# Altium PCB POWER.PcbDoc
Units mm, origin at the board's own origin, x right, y up, seen from the top; angles counter-clockwise.
Board outline 22 x 22 mm, 2 copper layers (Top Layer, Bottom Layer), stack 0.871 mm thick; 35 components, 21 nets, 122 pads, 114 vias.
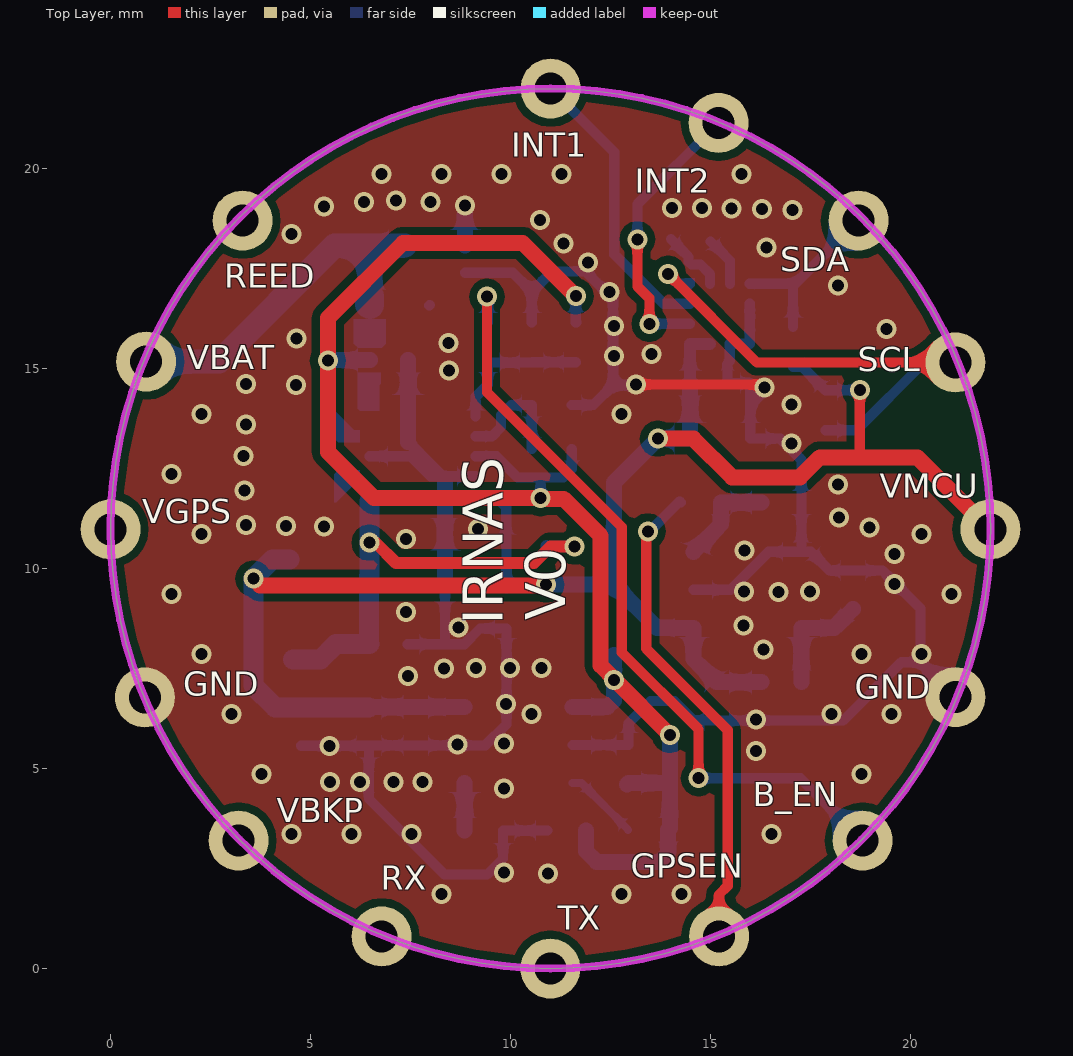
[diagram p0: Top Layer view]
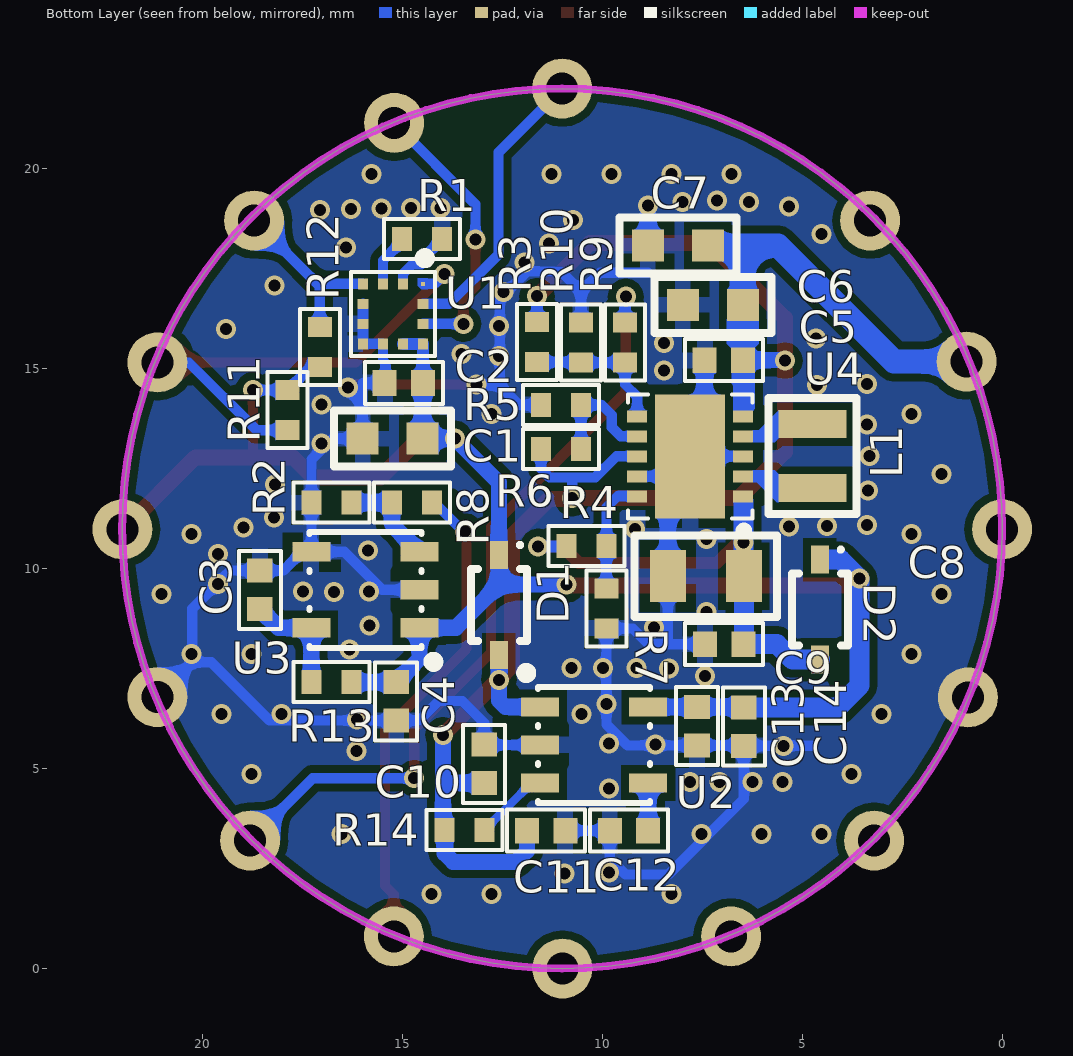
[diagram p1: Bottom Layer view, seen from below]

## Layer stack, top to bottom
Top Solder: solder mask 0.0102, Solder Resist, Dk 3.5
Top Layer: signal copper 0.0356
Dielectric 1: dielectric 0.8, FR-4, Dk 4.8
Bottom Layer: signal copper 0.0356
Bottom Solder: solder mask 0.0102, Solder Resist, Dk 3.5

## Board outline
11,0 cw(c11,11) 0,11 cw(c11,11) 11,22 cw(c11,11) 22,11 cw(c11,11)

## Design rules (kind name [scope] priority, off if disabled: settings)
Clearance [All] p1: gap=0.2 ignorepadtopadclearanceinfootprint=FALSE
PolygonConnect [All] p1: thpad.connectstyle=Direct thpad.reliefconductorwidth=0.254 thpad.reliefentries=4 thpad.polygonreliefangle="90 Angle" thpad.airgapwidth=0.254 smdpad.connectstyle=Relief smdpad.reliefconductorwidth=0.4 smdpad.reliefentries=4 smdpad.polygonreliefangle="90 Angle" smdpad.airgapwidth=0.254 via.connectstyle=Direct via.reliefconductorwidth=0.254 via.reliefentries=4 via.polygonreliefangle="90 Angle" via.airgapwidth=0.254
RoutingVias [All] p1: holewidth=0.3 width=0.5 viastyle="Through Hole" minholewidth=0.3 minwidth=0.5 maxholewidth=0.711 maxwidth=1.27
SolderMaskExpansion [All] p1: expansion=0.102
Width [All] p1: maxlimit=5 minlimit=0.2 preferedwidth=0.3
30 further rules are at their usual default settings.

## Classes and differential pairs
component class POWER: C3 C4 C5 C6 C7 C8 C9 C10 C11 C12 C13 C14 D1 D2 L1 R2 R3 R4 R5 R6 R7 R8 R9 R10 R13 R14 U2 U3 U4
component class MAIN_POWER: R11 R12
component class ACCELEROMETER: C1 C2 R1 U1

## Components (designator, comment, footprint, x,y, rotation, side; value= is the part's Value field where it differs from the comment)
C1 "10uF" CAP0603 15.24,13.25 r180 bottom
C2 "100nF" CAP0402 14.96,14.64 r180 bottom
C3 "2.2uF 6V3" CAP0402 18.56,9.47 r270 bottom
C4 "1uF" CAP0402 15.15,6.68 r90 bottom
C5 "100nF" CAP0402 6.96,15.21 r180 bottom
C6 "4u7/16V" CAP0603 7.23,16.59 r180 bottom
C7 "4u7/16V" CAP0603 8.107,18.073 r180 bottom
C8 "22u 6.3V" CAP0805 7.41,9.81 r180 bottom
C9 "100nF" CAP0402 6.95,8.11 r180 bottom
C10 "1uF" CAP0402 12.95,5.12 r270 bottom
C11 "100nF" CAP0402 11.4,3.45 r0 bottom
C12 "10nF" CAP0402 9.33,3.45 r180 bottom
C13 "1uF" CAP0402 7.63,6.06 r90 bottom
C14 "100nF" CAP0402 6.46,6.05 r90 bottom
D1 "BAT54HT1G" "SOD-323 2L" 12.58,9.09 r270 bottom
D2 "PMEG4005AEA,115" "SOD-323 2L" 4.56,8.976 r270 bottom
L1 "2.2uH" IND2.3X1.7 4.74,12.81 r270 bottom
R1 "10k" RES0402 14.504,18.24 r0 bottom
R2 "100k" RES0402 16.77,11.65 r180 bottom
R3 "0R" RES0402 11.63,15.66 r270 bottom
R4 "402k" RES0402 10.392,10.559 r0 bottom
R5 "0R" RES0402 11.03,14.09 r0 bottom
R6 "0R" RES0402 11.03,12.99 r0 bottom
R7 "100k" RES0402 9.896,9.003 r90 bottom
R8 "100R" RES0402 14.76,11.65 r0 bottom
R9 "100R" RES0402 9.43,15.65 r270 bottom
R10 "100k" RES0402 10.53,15.65 r270 bottom
R11 "10k" RES0402 17.87,13.96 r90 bottom
R12 "10k" RES0402 17.06,15.54 r270 bottom
R13 "0R" RES0402 16.77,7.16 r0 bottom
R14 "100k" RES0402 13.44,3.47 r180 bottom
U1 "LIS2DW12TR" LGA-12 15.23,16.37 r270 bottom
U2 "LP2985-25DBVR" SOT23-5 10.2,5.59 r270 bottom
U3 "TPS78318DDCT" SOT23-5 15.92,9.47 r90 bottom
U4 "STBB1-APUR" DFN-10 7.8,12.808 r90 bottom

## Footprints (in the part's own frame and the unit in brackets; to place one, negate y for a bottom-side part, rotate by r counter-clockwise, add the part's x,y. Pads: shape width x height; smd on the part's side, far side on the other; paste and mask are expansions set on the pad)
CAP0402 [mm] "Chip Capacitor, 2-Leads, Body 1.00x0.50mm, IPC Medium Density"
  rect 0.6x0.64 smd: 1(-0.48,0) 2(0.48,0)
  silkscreen extent -0.97,-0.53 0.97,0.53, body extent -0.55,-0.3 0.55,0.3, height 0.45
CAP0603 [mm]
  rect 0.8x0.8 smd: 1(-0.75,0) 2(0.75,0)
  silkscreen extent -1.46,-0.7 1.46,0.7, body extent -0.8,-0.4 0.8,0.4, height 0.9
CAP0805 [mm]
  rect 0.9x1.3 smd: 1(-0.95,0) 2(0.95,0)
  silkscreen extent -1.78,-1.02 1.78,1.02, body extent -1,-0.6 1,0.6, height 1.5
DFN-10 [mm]
  rect 3.1x1.75 smd: 0(0,0)
  rect 0.3x0.5 smd: 1(-1,-1.325) 2(-0.5,-1.325) 3(0,-1.325) 4(0.5,-1.325) 5(1,-1.325) 6(1,1.325) 7(0.5,1.325) 8(0,1.325) 9(-0.5,1.325) 10(-1,1.325)
  silkscreen extent -1.95,-1.56 1.55,1.56, body extent -1.55,-1.56 1.55,1.56, height 0.8
IND2.3X1.7 [mm]
  rect 0.7x1.7 smd: 1(-0.8,0) 2(0.8,0)
  silkscreen extent -1.45,-1.1 1.45,1.1, body extent -1,-0.8 1,0.8, height 0.95
LGA-12 [mm]
  rect 0.1x0.1 smd: 1(-0.75,0.75)
  rect 0.275x0.25 smd: 2(-0.75,0.25) 3(-0.75,-0.25) 4(-0.75,-0.75) 7(0.75,-0.75) 8(0.75,-0.25) 9(0.75,0.25) 10(0.75,0.75)
  rect 0.25x0.275 smd: 5(-0.25,-0.75) 6(0.25,-0.75) 11(0.25,0.75) 12(-0.25,0.75)
  Top Layer region: -0.615,0.875 -0.89,0.875 -0.89,0.625 -0.703,0.625 -0.615,0.713
  silkscreen extent -1.51,-1.05 1.05,1.05, body extent -1,-1 1,1, height 0.95
RES0402 [mm] "Chip Resistor, 2-Leads, Body 1.00x0.50mm, IPC Medium Density"
  rect 0.5x0.6 smd: 1(-0.5,0) 2(0.5,0)
  silkscreen extent -0.95,-0.5 0.95,0.5, body extent -0.5,-0.25 0.5,0.25, height 0.35
"SOD-323 2L" [mm]
  rect 0.7x0.45 smd: 1(-1.25,0) 2(1.25,0)
  silkscreen extent -1.55,-0.7 0.9,0.7, body extent -1.1,-0.67 1.1,0.67, height 1.1
SOT23-5 [mm]
  rect 0.48x0.95 smd: 1(-0.95,-1.35) 2(0,-1.35) 3(0.95,-1.35) 4(0.95,1.35) 5(-0.95,1.35)
  silkscreen extent -1.92,-1.83 1.45,1.4, body extent -1.45,-1.4 1.45,1.4, height 1.45

## Part data
C1: library part "C - 10uF/10V", "Cap Ceramic 10uF 10V X5R 10% SMD 0603 85C Paper T/R", Case/Package=0603, Case Code (Metric)=1608, Dielectric=X5R, IRNAS Part No.=/, Manufacturer=Samsung, Manufacturer Part Number=CL10A106KP8NNNC, Max Operating Temperature=85°C, Min Operating Temperature=-55°C, Package Quantity=1, Supplier Part Number 1=1276-1192-1-ND, Tolerance=10%, Voltage Rating=10V, Capacitance=10uF, Case Code (Imperial)=0603, ComponentLink1Description=https://www.verical.com/server-webapp/html/getDatasheet?partID=359551, ComponentLink1URL=https://www.verical.com/server-webapp/html/getDatasheet?partID=359551, ComponentLink2Description=http://www1.futureelectronics.com/doc/SAMSUNG%20PASSIVE/CL05B104KQ5NNNC.pdf, ComponentLink2URL=http://www1.futureelectronics.com/doc/SAMSUNG%20PASSIVE/CL05B104KQ5NNNC.pdf, ComponentLink3Description=https://produktinfo.conrad.com/datenblaetter/450000-474999/457369-da-01-en-VS_KONDENSATOR_0603.pdf, ComponentLink3URL=https://produktinfo.conrad.com/datenblaetter/450000-474999/457369-da-01-en-VS_KONDENSATOR_0603.pdf, Contact Plating=Tin, Depth=0.8mm, Height=0.8mm, Lead Free="Lead Free", Length=1.6mm, Material=Ceramic, Mount="Surface Mount", Packaging="Tape and Reel", Pricing 1="1=0.36, 10=0.248, 100=0.1403, 500=0.099, 1000=0.08663 (USD)", Radiation Hardening=No, Stock 1=2844657, Supplier 1=Digi-Key, Thickness=0.035inch, Voltage Rating (DC)=10V, Width=0.031inch
C2 C5 C9 C11 C14: library part "C - 100nF/0402", "MULTICOMP         MC0402X104J160CT             SMD Multilayer Ceramic Capacitor, 0402 [1005 Metric], 0.1 F, 16 V,  5%, X5R, MC Series                          New", Case Code (Imperial)=0402, Case Code (Metric)=1005, Dielectric=X5R, IRNAS Part No.=/, Manufacturer=Multicomp, Manufacturer Part Number=MC0402X104J160CT, Max Operating Temperature=85°C, Min Operating Temperature=-55°C, Supplier Part Number 1=2627419, Tolerance=5%, Voltage Rating=16V, Capacitance=100nF, ComponentLink1Description=http://www.farnell.com/datasheets/2117933.pdf, ComponentLink1URL=http://www.farnell.com/datasheets/2117933.pdf, ComponentLink2Description=http://www.farnell.com/datasheets/2117900.pdf, ComponentLink2URL=http://www.farnell.com/datasheets/2117900.pdf, Packaging="Tape and Reel", Pricing 1="10=0.0139, 100=0.0108, 500=0.0076, 2500=0.0051, 5000=0.0038 (EUR)", REACH SVHC="No SVHC", Stock 1=3230, Supplier 1=Farnell, Voltage Rating (DC)=16V
C3: library part "C - 2.2uF/6V3/0402", "CAP CER 2.2UF 6.3V 20% X5R 0402", Capacitance=2.2uF, Case/Package=0402, Case Code (Metric)=1005, Dielectric=X5R, IRNAS Part No.=/, Manufacturer=Murata, Manufacturer Part Number=GRM155R60J225ME15D, Max Operating Temperature=85°C, Min Operating Temperature=-55°C, Package Quantity=10000, Supplier Part Number 1=2362088, Tolerance=20%, Voltage=6.3V, Case Code (Imperial)=0402, ComponentLink1Description=https://datasheet.ciiva.com/29149/450128-da-01-de-vs-kondens-grm155-r60j-225me15d-29149006.pdf, ComponentLink1URL=https://datasheet.ciiva.com/29149/450128-da-01-de-vs-kondens-grm155-r60j-225me15d-29149006.pdf, ComponentLink2Description=https://datasheet.ciiva.com/46418/1754686-46418042.pdf, ComponentLink2URL=https://datasheet.ciiva.com/46418/1754686-46418042.pdf, ComponentLink3Description=https://datasheet.ciiva.com/17454/c02e-17454956.pdf, ComponentLink3URL=https://datasheet.ciiva.com/17454/c02e-17454956.pdf, ComponentLink4Description=https://datasheet.ciiva.com/235/partnumbering-e-01-235009.pdf, ComponentLink4URL=https://datasheet.ciiva.com/235/partnumbering-e-01-235009.pdf, ComponentLink5Description=https://datasheet.ciiva.com/2989/c02e-2989361.pdf, ComponentLink5URL=https://datasheet.ciiva.com/2989/c02e-2989361.pdf, ComponentLink6Description=https://datasheet.ciiva.com/235/partnumbering-e-01-235010.pdf, ComponentLink6URL=https://datasheet.ciiva.com/235/partnumbering-e-01-235010.pdf, ComponentLink7Description=https://datasheet.ciiva.com/235/partnumbering-e-01-235011.pdf, ComponentLink7URL=https://datasheet.ciiva.com/235/partnumbering-e-01-235011.pdf, Depth=0.5mm, Height=0.5mm, Lead Free="Lead Free", Length=1mm, Material=Ceramic, Mount="Surface Mount", Packaging="Tape and Reel", Pricing 1="10=0.118, 100=0.0494, 500=0.031, 2500=0.0213, 5000=0.0163 (EUR)", Radiation Hardening=No, REACH SVHC="No SVHC", Stock 1=0, Supplier 1=Farnell, Termination=SMD/SMT, Thickness=0.022inch, Voltage Rating=6.3V, Voltage Rating (DC)=6.3V, Width=0.02inch
C4 C10 C13: library part "C - 1uF/0402", "CAP CER 1UF 10V 20% X5R 0402", Case/Package=0402, Case Code (Metric)=1005, Dielectric=X5R, IRNAS Part No.=/, Manufacturer=Murata, Manufacturer Part Number=GRM155R61A105ME15D, Max Operating Temperature=85°C, Min Operating Temperature=-55°C, Package Quantity=1, Supplier Part Number 1=2426953, Tolerance=20%, Voltage=10V, Capacitance=1uF, Case Code (Imperial)=0402, ComponentLink1Description=https://datasheet.ciiva.com/164/product-164665.pdf, ComponentLink1URL=https://datasheet.ciiva.com/164/product-164665.pdf, ComponentLink2Description=https://datasheet.ciiva.com/11616/product-11616508.pdf, ComponentLink2URL=https://datasheet.ciiva.com/11616/product-11616508.pdf, ComponentLink3Description=https://datasheet.ciiva.com/46418/1769893-46418047.pdf, ComponentLink3URL=https://datasheet.ciiva.com/46418/1769893-46418047.pdf, ComponentLink4Description=https://datasheet.ciiva.com/164/partnumbering-e-01-164666.pdf, ComponentLink4URL=https://datasheet.ciiva.com/164/partnumbering-e-01-164666.pdf, ComponentLink5Description=https://datasheet.ciiva.com/164/partnumbering-e-01-164667.pdf, ComponentLink5URL=https://datasheet.ciiva.com/164/partnumbering-e-01-164667.pdf, Depth=0.5mm, Height=0.5mm, Lead Free="Lead Free", Length=1mm, Mount="Surface Mount", Packaging="Tape and Reel", Pricing 1="10=0.0379, 100=0.0266, 500=0.0156, 2500=0.0098, 5000=0.0083 (EUR)", Radiation Hardening=No, REACH SVHC="No SVHC", Stock 1=0, Supplier 1=Farnell, Thickness=0.022inch, Voltage Rating=10V, Voltage Rating (DC)=10V, Width=0.02inch
C6 C7: library part "C - 4u7  16V 0603", "MURATA - GRM188R61C475KAAJD - CAP, MLCC, X5R, 4.7UF, 16V, 0603", Capacitance=4.7, Capacitance Tolerance="± 10%", Ceramic Capacitor Case="0603 [1608 Metric]", Dielectric Characteristic=X5, IRNAS Part No.=I-200001, Manufacturer=MURATA, Manufacturer Part Number=GRM188R61C475KAAJD, Operating Temperature Max=85, Operating Temperature Min=-55, Supplier Part Number 1=2611924, Voltage Rating=16, Automotive Qualification Standard=-, ComponentLink1Description=http://www.farnell.com/datasheets/2079168.pdf, ComponentLink1URL=http://www.farnell.com/datasheets/2079168.pdf, MSL="MSL 1 - Unlimited", Packaging="Cut Tape", Pricing 1="10=0.16, 100=0.0929, 500=0.076, 1000=0.0618, 2000=0.0605, 4000=0.0425, 20000=0.0409, 40000=0.0355 (GBP)", Product Range="GRM Series", RoHS=YES, Stock 1=5038, Supplier 1=Farnell, SVHC="No SVHC (17-Dec-2015)<!--FANDB--><div class=\"features-and-benefits-container\"><div class=\"features-and-benefits-desc-container\"><span class=\"features-and-benefits-container-desc\">SMD Multilayer Ceramic Capacitor, 0603 [1608 Metric], 4.7 µF, 16 V, ± 10%, X5"
C8: library part "C - 22u 6.3V 0805", "MULTICOMP - MC0805X226M6R3CT - CAP, MLCC, X5R, 22UF, 0805", Capacitance=22, Capacitance Tolerance="± 20%", Capacitor Terminals=SMD, Ceramic Capacitor Case="0805 [2012 Metric]", Dielectric Characteristic=X5, IRNAS Part No.=I-200008, Manufacturer=MULTICOMP, Manufacturer Part Number=MC0805X226M6R3CT, Operating Temperature Max=85, Operating Temperature Min=-55, Operating Temperature Range="-55°C to +85°C<!--FANDB--><div class=\"features-and-benefits-container\"><div class=\"features-and-benefits-desc-container\"><span class=\"features-and-benefits-container-desc\">SMD Multilayer Ceramic Capacitor, 0805 [2012 Metric], 22 µF, 6.3 V, ± 20%, X5R, MC Series</span></div><div class=\"features-and-benefits-description\"><span class=\"features-benefits-value\">The Multicomp MC series is general purpose MLCC capacitors with X5R dielectric material which provides high electrical precision, stability and reliability. This MLCC capacitor consists of a conducting material and electrodes with high density and high efficiency ceramic condensers.</span></div><div class=\"features-and-benefits-list\"><ul class=\"features-and-benefits-list-list\"><li class=\"features-and-benefits-list-item\">Small size with higher capacitance values</li><li class=\"features-and-benefits-list-item\">0201, 0402, 0603, 0805, 1206, 1210, 1812 case sizes available</li><li class=\"features-and-benefits-list-item\">Capacitance value ranging from 100pF to 220?F</li><li class=\"features-and-benefits-list-item\">Capacitor with lead free termination (pure Tin)</li><li class=\"features-and-benefits-list-item\">High electrical precision, stability and reliability</li><li class=\"features-and-benefits-list-item\">Rated voltage of 4V, 6.3V, 10V, 16V, 25V, 50V</li><li class=\"features-and-benefits-list-item\">Operating temperature of -55°C to +85°C</li><li class=\"features-and-benefits-list-item\">Available in ±10% and ±20", Supplier Part Number 1=1759415, Voltage Rating=6.3, Automotive Qualification Standard=-, Capacitance Tolerance ±="± 20%", ComponentLink1Description=http://www.farnell.com/datasheets/1901289.pdf, ComponentLink1URL=http://www.farnell.com/datasheets/1901289.pdf, ComponentLink2Description=http://www.farnell.com/datasheets/1932399.pdf, ComponentLink2URL=http://www.farnell.com/datasheets/1932399.pdf, MSL=-, Packaging="Cut Tape", Pricing 1="5=0.128, 50=0.0738, 250=0.0507, 500=0.042, 1500=0.0358 (GBP)", Product Range="MC Series", RoHS=YES, Stock 1=74736, Supplier 1=Farnell, SVHC="No SVHC (07-Jul-2017)"
C12: library part "C - 10nF/0402", "CAP CER 10000PF 16V X7R 0402", Case/Package=0402, Case Code (Metric)=1005, Dielectric=X7R, IRNAS Part No.=/, Manufacturer=Murata, Manufacturer Part Number=GRM155R71C103KA01D, Max Operating Temperature=125°C, Min Operating Temperature=-55°C, Package Quantity=1, Supplier Part Number 1=1828864, Tolerance=10%, Voltage=16V, Capacitance=10nF, Case Code (Imperial)=0402, ComponentLink1Description=https://datasheet.ciiva.com/129/partnumbering-e-01-129774.pdf, ComponentLink1URL=https://datasheet.ciiva.com/129/partnumbering-e-01-129774.pdf, ComponentLink2Description=https://datasheet.ciiva.com/129/partnumbering-e-01-129775.pdf, ComponentLink2URL=https://datasheet.ciiva.com/129/partnumbering-e-01-129775.pdf, ComponentLink3Description=https://datasheet.ciiva.com/129/product-129776.pdf, ComponentLink3URL=https://datasheet.ciiva.com/129/product-129776.pdf, ComponentLink4Description=https://datasheet.ciiva.com/18184/getdatasheetpartid-178863-18184649.pdf, ComponentLink4URL=https://datasheet.ciiva.com/18184/getdatasheetpartid-178863-18184649.pdf, ComponentLink5Description=https://datasheet.ciiva.com/22698/608985-22698415.pdf, ComponentLink5URL=https://datasheet.ciiva.com/22698/608985-22698415.pdf, ComponentLink6Description=https://datasheet.ciiva.com/7937/608985-7937614.pdf, ComponentLink6URL=https://datasheet.ciiva.com/7937/608985-7937614.pdf, Depth=0.5mm, Height=0.5mm, Lead Free="Lead Free", Length=1mm, Mount="Surface Mount", Number of Pins=2, Packaging="Tape and Reel", Pricing 1="10=0.0216, 100=0.0151, 500=0.0104, 2500=0.0069, 5000=0.0056 (EUR)", Radiation Hardening=No, REACH SVHC="No SVHC", Stock 1=16478, Supplier 1=Farnell, Termination=SMD/SMT, Thickness=0.022inch, Voltage Rating=16V, Voltage Rating (DC)=16V, Width=0.02inch
D1: library part "DS - BAT54HT1G", "FAIRCHILD SEMICONDUCTOR - BAT54HT1G - DIODE, SCHOTTKY, 30V, SOD-323", Diode Case Style=SOD-323, Forward Current If(AV)=200, Forward Surge Current Ifsm Max=600, Forward Voltage VF Max=800, Manufacturer="FAIRCHILD SEMICONDUCTOR", Operating Temperature Max=150, Repetitive Reverse Voltage Vrrm Max=30, Supplier Part Number 1=2453769, Automotive Qualification Standard=-, ComponentLink1Description=http://www.farnell.com/datasheets/2251626.pdf, ComponentLink1URL=http://www.farnell.com/datasheets/2251626.pdf, Diode Configuration=Single, Manufacturer Part Number=BAT54HT1G, MSL="MSL 1 - Unlimited", No. of Pins=2, Packaging="Cut Tape", Pricing 1="1=0.0747, 250=0.065, 500=0.055, 1000=0.045, 3000=0.0349, 9000=0.0279 (GBP)", Product Range="BAT54 Series", Reverse Recovery Time trr Max="5ns<!--FANDB--><div class=\"features-and-benefits-container\"><div class=\"features-and-benefits-description\"><span class=\"features-benefits-value\">The BAT54HT1G is a Schottky Barrier Diode for general usage and suitable for many different applications.</span></div><div class=\"features-and-benefits-list\"><ul class=\"features-and-benefits-list-list\"><li class=\"features-and-benefits-list-item\">-65 to 150°C Storage temperature range</li><li class=\"features-and-benefits-list-item\">-55 to 150", RoHS=YES, Stock 1=5495, Supplier 1=Farnell, SVHC="No SVHC (15-Jun-2015)"
D2: library part "DS - PMEG4005AEA,115", "Schottky Rectifier, 40 V, 500 mA, Single", Manufacturer="MICRO COMMERCIAL COMPONENTS", Manufacturer Part Number=SK34A-TP, Supplier Part Number 1=1924423, ComponentLink1Description=Datasheet, ComponentLink1URL=D:\altium\Altium_Library\Active\Datasheet\PMEG4005AEA.pdf, Pricing 1="1=0.736, 10=0.574, 100=0.395, 250=0.328, 500=0.309, 1000=0.287, 5000=0.252, 10000=0.214 (GBP)", RoHS=Y-EX, Stock 1=3770, Supplier 1=Farnell
L1: library part "L - 2.2 uH 900mA", IRNAS Part No.=/, Manufacturer=Bourns, Manufacturer Part Number=SRN2009T-2R2M, Supplier Part Number 1=2808272, Pricing 1="5=0.308, 50=0.201, 250=0.163, 500=0.145, 1000=0.133, 2000=0.124, 10000=0.116 (EUR)", Stock 1=1975, Supplier 1=Farnell
R1 R11 R12: library part "R - 10k/0402", "MULTICOMP         MCWR04X1002FTL             SMD Chip Resistor, Thick Film, 10 kohm, 50 V, 0402 [1005 Metric], 62.5 mW,  1%, MCWR Series", Case/Package=0402, Case Code (Metric)=1005, IRNAS Part No.=I-100014, Manufacturer=Multicomp, Manufacturer Part Number=MCWR04X1002FTL, Power Rating=62.5mW, Resistance=10kR, Supplier Part Number 1=2447096, Temperature Coefficient=100ppm/°C, Tolerance=1%, Voltage Rating=50V, Case Code (Imperial)=0402, ComponentLink1Description=http://www.farnell.com/datasheets/1849611.pdf, ComponentLink1URL=http://www.farnell.com/datasheets/1849611.pdf, Composition="Thick Film", Packaging="Cut Tape", Pricing 1="10=0.0029, 100=0.0017, 500=0.0012, 2500=0.001, 5000=0.0008 (EUR)", REACH SVHC="No SVHC", Stock 1=602609, Supplier 1=Farnell, Voltage Rating (DC)=50V
R2 R7 R10 R14: library part "R - 100k/0402", "MULTICOMP   MCWR04X1003FTL   RES, THICK FILM, 100KOHM, 1%, 0.0625W", Case/Package=0402, Case Code (Metric)=1005, IRNAS Part No.=I-100013, Manufacturer=Multicomp, Manufacturer Part Number=MCWR04X1003FTL, Power Rating=62.5mW, Resistance=100kR, Supplier Part Number 1=2447094, Temperature Coefficient=100ppm/°C, Tolerance=1%, Voltage Rating=50V, Case Code (Imperial)=0402, ComponentLink1Description=https://datasheet.ciiva.com/46386/1849611-46386524.pdf, ComponentLink1URL=https://datasheet.ciiva.com/46386/1849611-46386524.pdf, Composition="Thick Film", Mount="Surface Mount", Packaging="Cut Tape", Pricing 1="10=0.0029, 100=0.0017, 500=0.0012, 2500=0.001, 5000=0.0008 (EUR)", REACH SVHC="No SVHC", Stock 1=161188, Supplier 1=Farnell, Voltage Rating (DC)=50V
R3 R5 R6 R13: library part "R - 0R/0402", "RESISTOR, 0402, 0R, ANTI SULFURATION", Case/Package=0402, Case Code (Metric)=1005, IRNAS Part No.=I-100016, Manufacturer=Multicomp, Manufacturer Part Number=MCMR04X000PTL, Power Rating=62.5mW, Resistance=0mR, Supplier Part Number 1=2072513, Temperature Coefficient=400ppm/°C, Voltage Rating=50V, Case Code (Imperial)=0402, ComponentLink1Description=https://datasheet.ciiva.com/7776/1716705-7776974.pdf, ComponentLink1URL=https://datasheet.ciiva.com/7776/1716705-7776974.pdf, ComponentLink2Description=https://datasheet.ciiva.com/28677/1716705-28677161.pdf, ComponentLink2URL=https://datasheet.ciiva.com/28677/1716705-28677161.pdf, Composition=Ceramic, Packaging="Cut Tape", Pricing 1="10=0.0057, 100=0.0034, 500=0.0024, 2500=0.0019, 5000=0.0015 (EUR)", REACH SVHC="No SVHC", Stock 1=0, Supplier 1=Farnell, Voltage Rating (DC)=50V
R4: library part "R - 402k", "MULTICOMP - MC0063W06031402K - RES, THICK FILM, 402K, 1%, 0.063W, 0603", IRNAS Part No.=/, Manufacturer=MULTICOMP, Manufacturer Part Number=MC0063W06031402K, Power Rating=63, Resistance=402, Resistance Tolerance="± 1%", Resistor Case Style="0603 [1608 Metric]", Resistor Element Material="Thick Film", Resistor Mounting="Surface Mount Device<!--FANDB--><div class=\"features-and-benefits-container\"><div class=\"features-and-benefits-desc-container\"><span class=\"features-and-benefits-container-desc\">SMD Chip Resistor, Thick Film, 402 kohm, 50 V, 0603 [1608 Metric], 63 mW, ± 1%, MC Series</span></div><div class=\"features-and-benefits-description\"><span class=\"features-benefits-value\">The Multicomp MC series current sense resistors are thick film chip resistors. The resistance range includes E96 and E24 decade values from 1ohm to 10Mohm.</span></div><div class=\"features-and-benefits-list\"><ul class=\"features-and-benefits-list-list\"><li class=\"features-and-benefits-list-item\">EIA 0402, 0603, 0805, 1206 chip sizes available</li><li class=\"features-and-benefits-list-item\">Small size and low weight</li><li class=\"features-and-benefits-list-item\">Suitable for both wave and reflow soldering</li><li class=\"features-and-benefits-list-item\">Reduction of assembly costs</li><li class=\"features-and-benefits-list-item\">Maximum working voltage of 50V(0402, 0603), 150V(0805), 200V(1206)</li><li class=\"features-and-benefits-list-item\">Available in ±1%, ±2% and ±5% tolerance</li><li class=\"features-and-benefits-list-item\">Power rating of 62.5mW, 100mW and 125mW</li><li class=\"features-and-benefits-list-item\">±400ppm/°C(1ohm to 10ohm), ±200ppm/°C(11ohm to 100ohm), ±100", Supplier Part Number 1=2131065, Temperature Coefficient="± 100", Voltage Rating=50, Automotive Qualification Standard=-, ComponentLink1Description=http://www.farnell.com/datasheets/1788326.pdf, ComponentLink1URL=http://www.farnell.com/datasheets/1788326.pdf, ComponentLink2Description=http://www.farnell.com/datasheets/1944283.pdf, ComponentLink2URL=http://www.farnell.com/datasheets/1944283.pdf, Packaging="Tape & Reel", Pricing 1="5000=0.0007, 25000=0.0006, 50000=0.0005 (GBP)", Product Range="MC Series", Reel Quantity=5000, RoHS=Y-EX, Stock 1=104996, Supplier 1=Farnell, SVHC="No SVHC (12-Jan-2017)"
R8 R9: library part "R - 100R/0402", "MULTICOMP         MCMR04X1000FTL            SMD Chip Resistor, Ceramic, MCMR Series, 100 ohm, 50 V, 0402 [1005 Metric], 62.5 mW,  1%", Case/Package=0402, Case Code (Metric)=1005, IRNAS Part No.=/, Manufacturer=Multicomp, Manufacturer Part Number=MCMR04X1000FTL, Power Rating=62.5mW, Supplier Part Number 1=2072515, Temperature Coefficient=100ppm/°C, Tolerance=1%, Voltage Rating=50V, Case Code (Imperial)=0402, ComponentLink1Description=https://datasheet.ciiva.com/28692/1716705-28692087.pdf, ComponentLink1URL=https://datasheet.ciiva.com/28692/1716705-28692087.pdf, ComponentLink2Description=https://datasheet.ciiva.com/22708/1716705-22708156.pdf, ComponentLink2URL=https://datasheet.ciiva.com/22708/1716705-22708156.pdf, Composition=Ceramic, Packaging="Cut Tape", Pricing 1="10=0.0071, 100=0.0042, 500=0.003, 2500=0.0024, 5000=0.0019 (GBP)", REACH SVHC="No SVHC", Resistance=100R, Stock 1=62365, Supplier 1=Farnell, Voltage Rating (DC)=50V
U1: library part "SEN - LIS2DW12TR", "MEMS Accelerometer, Digital, X, Y, Z, ± 2g, ± 4g, ± 8g, ± 16g, 1.62 V, 3.6 V", Case/Package=QFN, Manufacturer="TDK InvenSense", Manufacturer Part Number=MPU-9250, Max Operating Temperature=85°C, Max Supply Voltage=3.6V, Min Operating Temperature=-40°C, Min Supply Voltage=2.4V, Package Quantity=1, Supplier Part Number 1=883-7942P, ComponentLink1Description=Datasheet, ComponentLink1URL=D:\altium\Altium_Library\Active\Datasheet\LIS2DW12TR.pdf, Height=1mm, Interface=I2C, Length=3.1mm, Mount="Surface Mount", Number of Pins=24, Output Type=SPI, RoHS=Yes, Sensor Type=Accelerometer, Stock 1=0, Supplier 1=RSComponents, Width=3.1mm
U2: library part "V_LIN - LP2985-25DBVR", "Fixed LDO Voltage Regulator, 2.2V to 16V, 280mV Dropout, 2.5Vout, 150mAout", DC / DC Converter IC Case=TO-263, Input Voltage Max=45, Input Voltage Min=4.5, Manufacturer="ON SEMICONDUCTOR", Manufacturer Part Number=LM2596DSADJG, Operating Temperature Max=125, Output Current=3, Output Voltage Max=37, Output Voltage Min=1.23, Supplier Part Number 1=2534162, Switching Frequency=150, Automotive Qualification Standard=-, ComponentLink1Description=http://www.farnell.com/datasheets/2031954.pdf, ComponentLink1URL=http://www.farnell.com/datasheets/2031954.pdf, MSL="MSL 1 - Unlimited", No. of Outputs=1, No. of Pins=5, Packaging=Each, Pricing 1="1=1.98, 10=1.49, 100=1.19, 500=1.04, 1000=0.859, 2500=0.785 (GBP)", Product Range=-, RoHS=YES, Stock 1=342, Supplier 1=Farnell, SVHC="No SVHC (12-Jan-2017", Topology="Buck (Step Down)"
U3: library part "V_LIN - TPS78318DDCT", "Fixed LDO Voltage Regulator, 2.2V to 5.5V, 130mV Dropout, 1.8Vout, 150mAout", DC / DC Converter IC Case=TO-263, Input Voltage Max=45, Input Voltage Min=4.5, Manufacturer="ON SEMICONDUCTOR", Manufacturer Part Number=LM2596DSADJG, Operating Temperature Max=125, Output Current=3, Output Voltage Max=37, Output Voltage Min=1.23, Supplier Part Number 1=2534162, Switching Frequency=150, Automotive Qualification Standard=-, ComponentLink1Description=http://www.farnell.com/datasheets/2031954.pdf, ComponentLink1URL=http://www.farnell.com/datasheets/2031954.pdf, MSL="MSL 1 - Unlimited", No. of Outputs=1, No. of Pins=5, Packaging=Each, Pricing 1="1=1.98, 10=1.49, 100=1.19, 500=1.04, 1000=0.859, 2500=0.785 (GBP)", Product Range=-, RoHS=YES, Stock 1=342, Supplier 1=Farnell, SVHC="No SVHC (12-Jan-2017", Topology="Buck (Step Down)"
U4: library part "V_SW - STBB1-APUR", "DC-DC Switching Buck-Boost Regulator, Adjustable, 2V-5.5Vin, 1.2V-5.5Vout, 1Aout", Manufacturer=u-blox, Manufacturer Part Number=MAX-M8Q-0, Supplier Part Number 1=700-MAX2659ELT+T, ComponentLink1Description=Datasheet, ComponentLink1URL=D:\altium\Altium_Library\Active\Datasheet\stbb-axx.pdf, Stock 1=10805, Supplier 1=Mouser, Supplier 2=Farnell, Supplier Part Number 2=2800966

## Free pads (board coordinates)
  round 1.5 hole 0.8: 1(11,22) 1(11,22) 1(11,22) 1(11,22) 2(15.199,21.142) 2(15.199,21.142) 3(18.7,18.7) 3(18.7,18.7) 4(21.119,15.153) 5(21.993,10.983) 6(21.122,6.788) 7(18.8,3.2) 8(15.211,0.807) 9(10.993,0) 10(6.778,0.803) 11(3.2,3.2) 12(0.857,6.78) 13(0,10.983) 14(0.89,15.176) 15(3.3,18.7)
  round 0.25 hole 0.8 unplated: 16(4.04,1.5) 16(4.967,0.9) 16(5.047,21.097) 16(22.37,7.99) 16(22.64,9.1) 17(6.025,21.607) 18(6.997,22.027)

## Via types
v1: diameter 0.5, hole 0.3, Top Layer to Bottom Layer, tented both sides, 114 vias

## Nets (pads, with @x,y where several pads share a name; then routed paths per layer and width w, separated by ;. In a path a pad name is that pad's centre, name@x,y a point inside that pad or via, vN(x,y) a via of type N, cw(c..) or ccw(c..) an arc to the next point about the centre after c; other vN are vias at no path point)
A_INT1: pad.1 U1.12 | length 7.2
  Bottom Layer w0.254: pad.1@11,22 12.59,20.41 12.59,17.86 13.83,16.62 U1.12
A_INT2: pad.2 U1.11 | length 7
  Top Layer w0.254: v1(13.17,18.23) 13.17,17.06 13.47,16.76 v1(13.47,16.12)
  Bottom Layer w0.254: v1(13.17,18.23) 13.17,19.112 pad.2@15.199,21.142 ; v1(13.47,16.12) U1.11
BOOST_EN: pad.7 R9.1 | length 19.6
  Top Layer w0.254: v1(9.41,16.8) 9.41,14.405 12.777,11.038 12.777,7.903 14.7,5.98 v1(14.7,4.76)
  Bottom Layer w0.254: v1(9.41,16.8) 9.43,16.78 R9.1 ; v1(14.7,4.76) 17.24,4.76 pad.7
FB: R4.1 R7.2 U4.10 | length 2.9
  Bottom Layer w0.254: U4.10 9.132,11.815 9.611,11.815 9.892,11.534 R4.1 9.896,10.555 R7.2
GND: C1.1 C2.1 C3.1 C4.1 C5.1 C6.1 C7.1 C8.1 C9.1 C10.1 C11.1 C12.1 C13.1 C14.1 pad.6 pad.12 R1.1 R2.1 R5.2 R7.1 R10.1 U1.2 U1.5 U1.6 U1.7 U1.8 U2.2 U3.2 U3.4 U4.0 U4.3 U4.9 | length 71.9
  Top Layer w0.254: v1(13.14,14.603) 16.242,14.603 v1@16.315,14.53
  Bottom Layer w0.25: R1.1 14.45,17.794 14.45,17.67 14.52,17.6 14.75,17.6 14.98,17.37 U1.2
  Bottom Layer w0.254: pad.12 pad.12@0.867,6.77 ; 4.76,5.57 v1(5.47,5.57) C14.1 ; U4.3 U4.0@7.5,12.808 ; C9.1 8.344,8.11 ; U4.0@7.44,13.168 U4.0 ; C6.1@7.968,16.578 C6.1 ; C8.1 8.36,8.126 8.344,8.11 ; U4.0@8.36,12.248 U4.0@8.3,12.308 ; 8.857,17.395 10.055,17.395 10.53,16.92 ; U4.9 U4.0@8.3,12.308 ; R10.1 10.53,16.92 ; C11.1 C12.1 9.81,2.75 9.41,2.35 8.35,2.35 6.46,4.24 C14.1 ; R5.2 12.07,14.09 12.56,14.58 ; U2.2 12.94,5.59 C10.1 12.95,6.14 13.5,6.69 14.09,6.69 14.58,6.2 C4.1 18.31,6.2 19.77,7.66 v1@20.25,7.66 ; v1(13.14,14.603) 13.117,14.58 12.56,14.58 ; U3.2 15.5,9.47 16.45,10.42 U3.4 ; U1.5 U1.6 U1.7 U1.8 15.48,15.19 15.42,15.13 15.42,14.66 C2.1 15.99,14.64 15.99,14.09 ; v1(16.35,14.53) 16.35,14.45 15.99,14.09 ; pad.6 v1@20.25,7.66 ; C14.1 6.47,5.58 C13.1 9.37,5.58 9.896,6.106 R7.1 9.236,8.503 8.843,8.11 8.344,8.11 ; U4.0@7.5,12.808 8,12.308 U4.0@8.3,12.308 ; U4.0@7.5,12.808 U4.0 ; U4.0 U4.0@8.3,12.308 ; 10.53,16.92 11.04,17.43 11.87,17.43 12.56,16.74 12.56,14.58 ; 15.99,14.09 C1.1 16.74,13.25 17.27,12.72 R2.1 U3.4 ; U3.4 17.505,10.42 17.975,9.95 C3.1 19.3,9.95 20.25,9 v1@20.25,7.66
  Bottom Layer w0.4: U4.0@7.44,13.168 C5.1 ; C8.1 U4.0@8.36,12.248 ; C7.1 8.857,19.079 v1(8.861,19.083)
  other v1: 8.268,1.86 12.768,1.86 14.268,1.86 9.83,2.4 10.94,2.38 4.518,3.36 6.018,3.36 7.518,3.36 16.518,3.36 9.83,4.5 5.49,4.66 6.24,4.66 7.8,4.66 7.07,4.67 3.768,4.86 18.768,4.86 16.14,5.443 8.67,5.6 9.83,5.63 16.13,6.23 3.018,6.36 10.518,6.36 18.018,6.36 19.518,6.36 9.89,6.61 7.43,7.31 8.33,7.5 9.14,7.51 9.98,7.51 10.77,7.51 2.268,7.86 18.768,7.86 20.268,7.86 16.32,7.983 8.7,8.529 15.82,8.58 7.39,8.91 1.518,9.36 21.018,9.36 16.7,9.41 15.83,9.43 17.48,9.43 19.6,9.61 19.6,10.36 15.85,10.45 7.39,10.74 2.268,10.86 20.268,10.86 9.18,10.99 18.97,11.023 4.38,11.059 5.33,11.05 3.38,11.09 18.21,11.276 3.35,11.958 18.18,12.1 1.518,12.36 3.32,12.82 17.02,13.123 3.38,13.6 2.268,13.86 12.768,13.86 17.02,14.1 4.63,14.594 3.38,14.612 8.46,14.95 12.58,15.32 13.518,15.36 8.45,15.64 4.65,15.75 19.4,15.99 12.58,16.07 12.47,16.92 18.19,17.073 11.94,17.65 16.4,18.022 11.326,18.124 4.518,18.36 10.73,18.72 17.05,18.97 14.04,19.01 14.78,19.01 15.52,19 16.28,18.99 5.33,19.05 6.33,19.17 7.993,19.17 7.13,19.2 6.768,19.86 8.268,19.86 9.768,19.86 11.268,19.86 15.768,19.86
GPS_EN: pad.8 R8.1 | length 12.2
  Top Layer w0.254: v1@13.39,10.93 13.39,8 15.43,5.96 15.43,2.07 15.211,1.851 pad.8
  Bottom Layer w0.254: v1(13.43,10.93) 13.48,10.93 14.23,11.68 R8.1
NetC8_2: C8.2 C9.2 D2.2 R4.2 U4.1 | length 11.9
  Top Layer w0.3: v1(6.47,10.65) 6.625,10.65 7.135,10.14 10.581,10.14 10.992,10.55 v1(11.6,10.55)
  Bottom Layer w0.3: R4.2 10.901,10.55 v1(11.6,10.55)
  Bottom Layer w0.5: D2.2 5.246,7.726 5.63,8.11 C9.2 6.46,8.12 C8.2 6.475,9.825 6.47,9.83 v1(6.47,10.65) 6.47,11.685 U4.1@6.475,11.69
NetC12_2: C12.2 U2.4 | length 1.2
  Bottom Layer w0.4: C12.2 U2.4
NetL1_1: L1.1 U4.4
NetL1_2: L1.2 U4.2
NetR1_2: R1.2 U1.3 | length 1.3
  Bottom Layer w0.25: R1.2@15,18.18 15.48,17.7 U1.3
NetR2_2: R2.2 R8.2 U3.3 | length 2.5
  Bottom Layer w0.4: U3.3 15.26,11.11 R8.2 R2.2
NetR3_2: R3.2 R9.2 R10.2 U4.6 | length 3.7
  Bottom Layer w0.254: U4.6 9.125,14.298 9.43,14.603 R9.2 R10.2 10.54,15.16 R3.2
NetR5_1: R5.1 R6.1 U4.7 | length 3
  Bottom Layer w0.254: U4.7 9.538,13.308 9.76,13.53 9.76,13.84 10.01,14.09 R5.1 R6.1
NetR14_2: R14.2 U2.3 | length 1.9
  Bottom Layer w0.2: U2.3 11.77,4.64 R14.2
REED: 
SCL: pad.4 R11.1 U1.1 | length 12.7
  Top Layer w0.254: v1(13.94,17.37) 16.157,15.153 pad.4
  Bottom Layer w0.254: v1(13.94,17.37) 14.19,17.12 U1.1 ; R11.1 18.64,13.46 20.333,15.153 pad.4
SDA: pad.3 R12.1 U1.4 | length 4.5
  Bottom Layer w0.254: U1.4 17.12,17.12 ; R12.1 17.06,17.06 17.12,17.12 ; pad.3@18.7,18.7 17.12,17.12
VBAT: C5.2 C6.2 C7.2 C10.2 C11.2 D1.2 pad.14 R3.1 R6.2 R14.1 U2.1 U4.5 U4.8 | length 48.2
  Top Layer w0.4: v1(11.63,16.81) 10.3,18.14 7.31,18.14 5.43,16.26 v1(5.43,15.2) 5.43,12.92 6.59,11.76 v1(10.75,11.76) 10.769,11.741 11.329,11.741 12.25,10.82 12.25,7.577 12.59,7.237 12.59,7.23 v1(13.98,5.84)
  Bottom Layer w0.254: U4.8 9.642,12.808 10.17,12.28 10.745,12.28 ; v1(10.75,11.76) 10.75,12.275 10.745,12.28 ; R6.2 11.53,12.49 11.32,12.28 10.745,12.28 ; v1(11.63,16.81) R3.1 R3.1@11.642,16.16
  Bottom Layer w0.4: v1(5.43,15.2) 5.44,15.21 C5.2 ; U2.1 12.42,6.54 12.58,6.7 v1(12.58,7.22) D1.2 ; C11.2 11.88,2.94 12.15,2.67 13.729,2.67 13.94,2.881 R14.1 13.98,3.51 13.98,4.66 ; C10.2@12.91,4.6 C10.2 13.96,4.64 13.98,4.66 ; v1(13.98,5.84) 13.98,4.66
  Bottom Layer w0.6: pad.14 2.706,15.176 5.603,18.073 6.483,18.073 ; C6.2 6.483,16.593 6.483,18.073 ; C7.2 6.483,18.073
  Bottom Layer w0.7: C6.2@6.464,16.606 C6.2 C6.2@6.48,16.81
VGPS: C3.2 R13.2 U3.5 | length 2.8
  Bottom Layer w0.4: R13.2 U3.5 18.09,8.52 C3.2
VMCU: C1.2 C2.2 C4.2 C13.2 C14.2 D1.1 D2.1 R11.2 R12.2 R13.1 U1.9 U1.10 U2.5 U3.1 | length 44.6
  Top Layer w0.254: v1(18.73,14.46) 18.73,12.79 18.74,12.78
  Top Layer w0.4: v1(3.569,9.75) 3.739,9.58 10.87,9.58 v1(10.89,9.6) ; v1(13.68,13.25) 14.57,13.25 15.54,12.28 17.23,12.28 17.73,12.78 18.74,12.78 20.17,12.78 21.967,10.983 21.993,10.983
  Bottom Layer w0.254: R12.2 17.29,15.04 R11.2 v1(18.73,14.46)
  Bottom Layer w0.3: C2.2 U1.10 U1.9
  Bottom Layer w0.4: C14.2 6.47,6.54 C13.2 U2.5 ; v1(10.89,9.6) 12.58,9.6 ; C2.2 14.49,14.63 C1.2 v1(13.68,13.25) 12.58,12.15 D1.1 12.58,9.6 ; R13.1 C4.2 14.57,7.74 U3.1 13.66,8.52 12.58,9.6
  Bottom Layer w0.5: D2.1@4.47,10.226 4.045,10.226 v1(3.569,9.75) 3.569,7.072 4.11,6.53 C14.2

## Polygon pours and split planes (outlines as drawn)
GND on Bottom Layer "Bottom Layer-GND" (solid, remove dead copper, pour order 0): 0,11 cw(c11,11) 11,22 cw(c11,11.007) 21.993,11.007 21.993,10.993 cw(c11,10.993) 11,0 cw(c11,11)
GND on Top Layer "Top Layer-GND" (solid, remove dead copper, pour order 2): 11,22 cw(c11,11.02) 21.98,11.02 21.98,10.98 cw(c11,10.98) 11,0 cw(c11,11) 0,11 cw(c11,11)

## Keep-outs
Keep-Out Layer:
  circle w0.2: c11,11 r11

## Other copper
Bottom Layer:
  region net VBAT: 6.225,13.95 6.18,13.995 6.18,14.9 6.76,14.9 6.76,14.619 6.72,14.569 6.72,13.95 6.31,13.95
  region net VBAT: 6.88,16.23 6.08,16.23 6.08,15.626 6.186,15.52 6.78,15.52 6.88,15.62
  region net NetL1_2: 6.232,12.158 6.139,12.158 5.641,11.66 5.586,11.66 5.586,12.36 5.684,12.458 6.232,12.458
  region net NetL1_1: 6.23,13.158 5.688,13.158 5.586,13.26 5.586,13.96 6.089,13.458 6.23,13.458

## Silkscreen, mask and mechanical layers (free items; w line width, h text height)
Top Overlay:
  text "INT1" at 10.02,20.29 h0.6
  text "INT2" at 13.11,19.4 h0.6
  text "SDA" at 16.74,17.43 h0.6
  text "REED" at 2.84,17.02 h0.6
  text "VBAT" at 1.91,14.98 h0.6
  text "SCL" at 18.68,14.93 h0.6
  text "VMCU" at 19.23,11.77 h0.6
  text "VGPS" at 0.79,11.13 h0.6
  text "V0" at 11.37,8.704 h1 r90
  text "IRNAS" at 9.81,8.594 h1 r90
  text "GND" at 1.82,6.82 h0.6
  text "GND" at 18.6,6.75 h0.6
  text "B_EN" at 16.06,4.06 h0.6
  text "VBKP" at 4.16,3.66 h0.6
  text "GPSEN" at 13.01,2.27 h0.6
  text "RX" at 6.75,1.97 h0.6
  text "TX" at 11.18,0.97 h0.6
Route Tool Path:
  lines w2: 3.117,1.976 cw(c11.007,11.017) 3.873,20.666 ; 5.706,0.251 ccw(c11.007,11.017) 22.301,6.96 ; 7.99,22.632 cw(c11.007,11.017) 23.007,11.017 cw(c11.007,11.017) 22.97,10.074